# Altium PCB Motion_detector_ESP32.PcbDoc
Units mm, origin at the board's own origin, x right, y up, seen from the top; angles counter-clockwise.
Board outline 34 x 63 mm, 2 copper layers (Top Layer, Bottom Layer); 4 components, 15 nets, 35 pads, 0 vias.
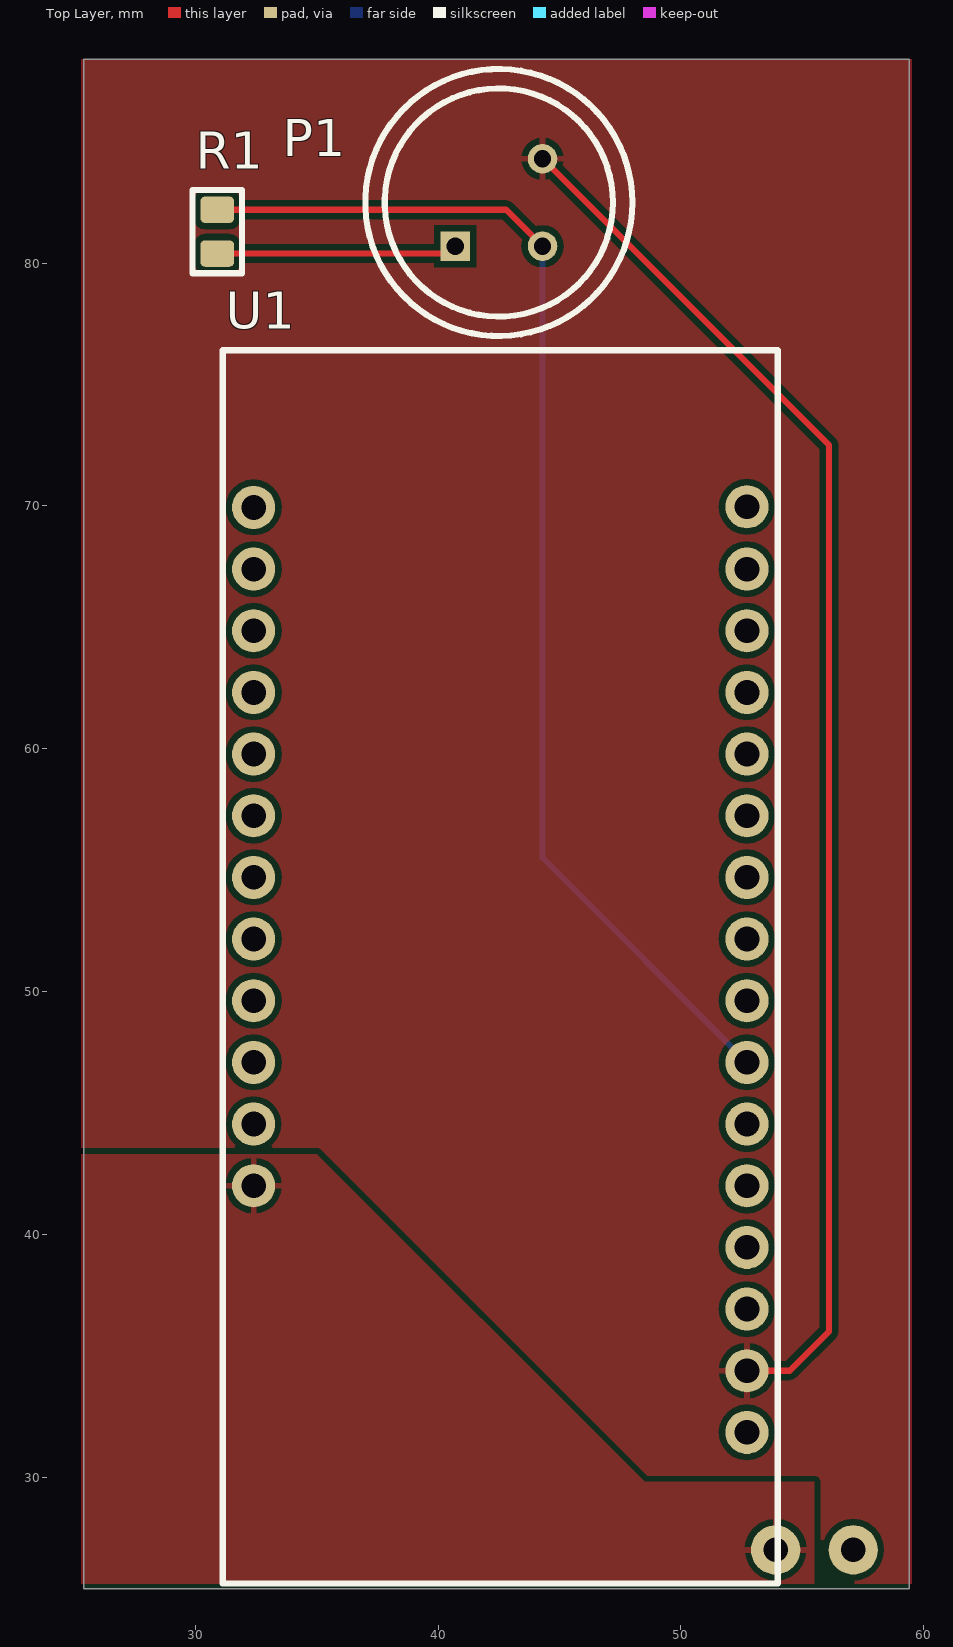
[diagram p0: Top Layer view]
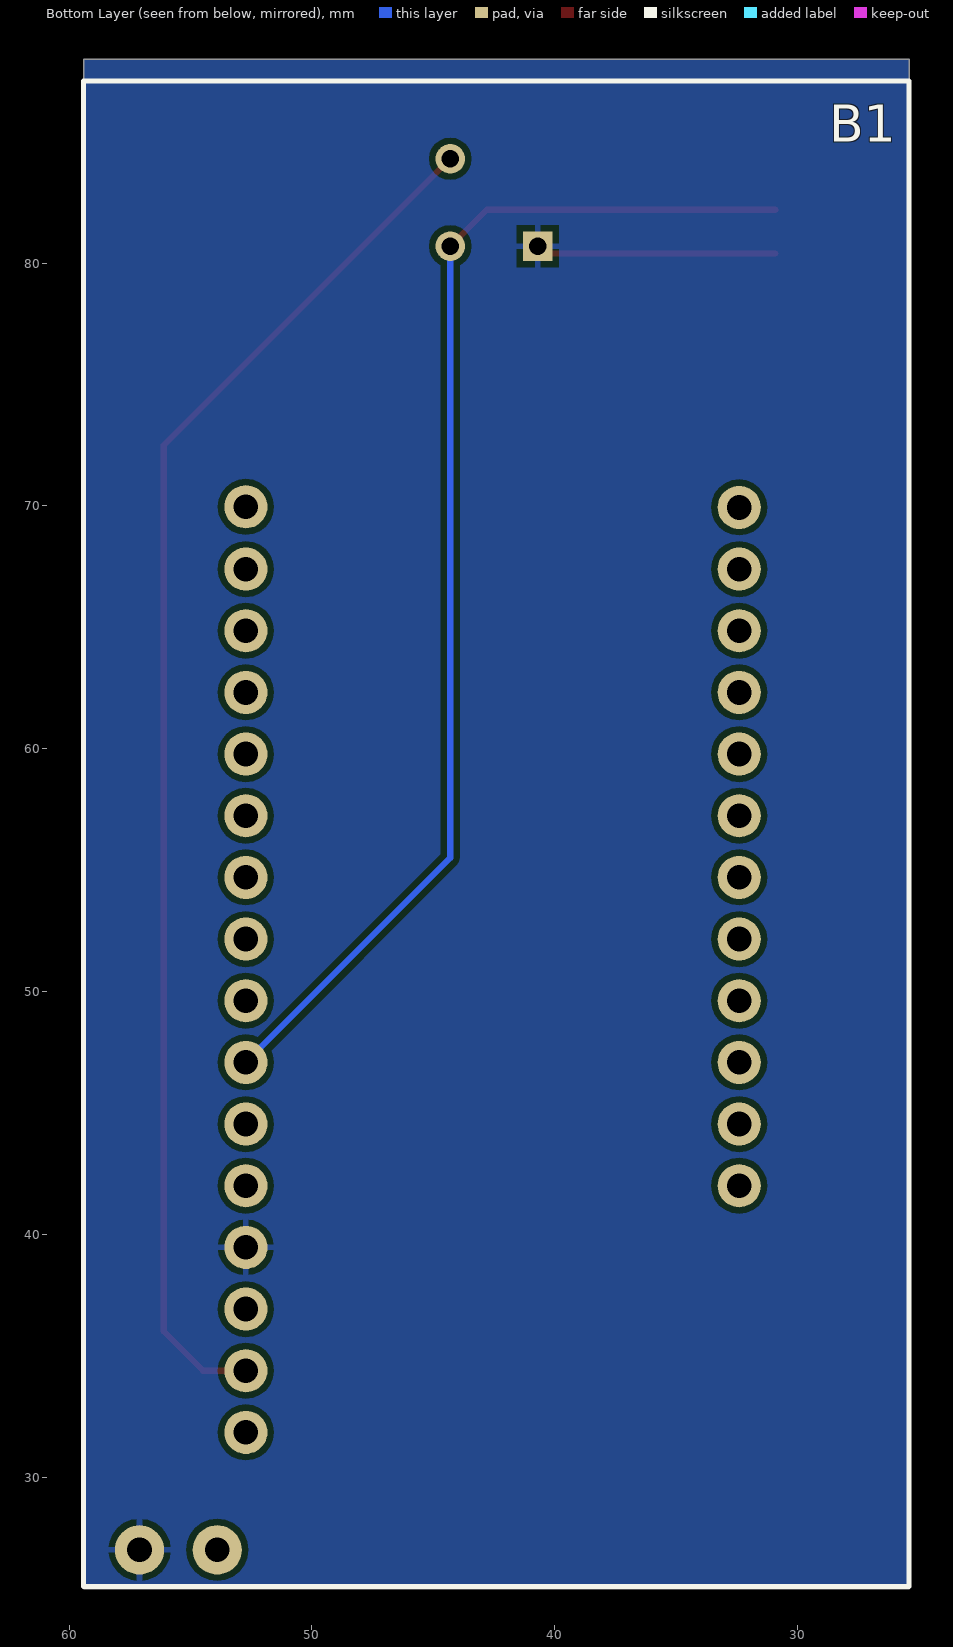
[diagram p1: Bottom Layer view, seen from below]
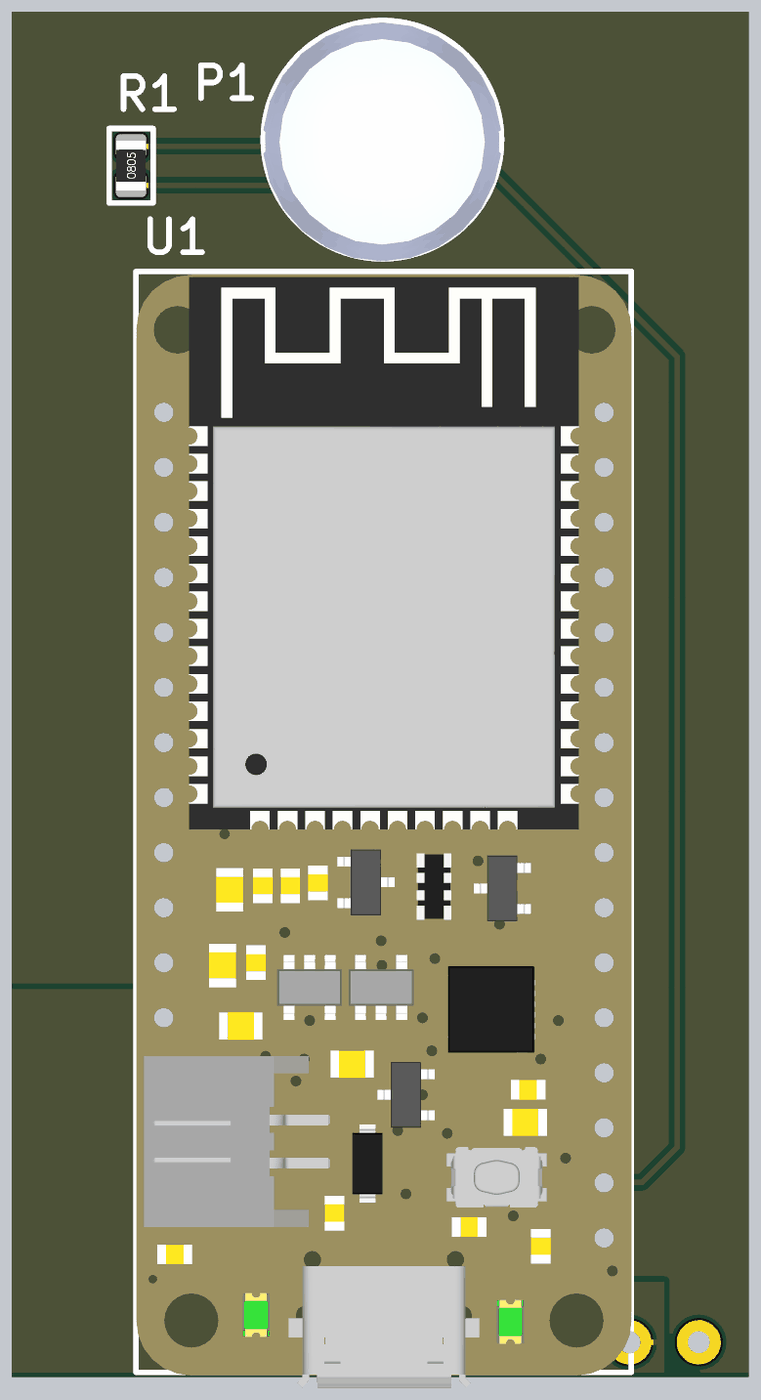
[diagram p2: 3D render of the assembled board from above, using the file's embedded part models]

## Layer stack, top to bottom
Top Solder: solder mask 0.0102, Solder Resist, Dk 3.5
Top Layer: signal copper 0.0356
Dielectric 1: dielectric 0.32, FR-4, Dk 4.8
Bottom Layer: signal copper 0.0356
Bottom Solder: solder mask 0.0102, Solder Resist, Dk 3.5

## Board outline
25.4,25.4 59.4,25.4 59.4,88.4 25.4,88.4

## Design rules (kind name [scope] priority, off if disabled: settings)
Clearance [All] p1: gap=0.254 ignorepadtopadclearanceinfootprint=FALSE except(0: Arc-Hole Track-Hole SMDPad-Hole THPad-Hole Via-Hole Fill-Hole Poly-Hole Region-Hole Text-Hole)
PolygonConnect [All] p1: connectstyle=Relief reliefconductorwidth=0.254 reliefentries=4 polygonreliefangle="90 Angle" airgapwidth=0.254
RoutingVias [All] p1: holewidth=0.711 width=1.27 viastyle="Through Hole" minholewidth=0.711 minwidth=1.27 maxholewidth=0.711 maxwidth=1.27
SolderMaskExpansion [All] p1: expansion=0.102
Width [All] p1: maxlimit=0.254 minlimit=0.254 preferedwidth=0.254
30 further rules are at their usual default settings.

## Components (designator, comment, footprint, x,y, rotation, side; value= is the part's Value field where it differs from the comment)
B1 "Battery" BATTERY-3.7V-1200MAH 59.4,25.5 r180 bottom
P1 "PIR Motion Sensor" EKMB1301111K 42.5,82.5 r0 top
R1 "RES - 0805" RES_0805 30.9,81.3 r90 top value=4.7k (schematic designator R?)
U1 "ESP32_FEATHER_ADAFRUIT" ESP32_FEATHER 32.4,31.84 r90 top

## Footprints (in the part's own frame and the unit in brackets; to place one, negate y for a bottom-side part, rotate by r counter-clockwise, add the part's x,y. Pads: shape width x height; smd on the part's side, far side on the other; paste and mask are expansions set on the pad)
BATTERY-3.7V-1200MAH [mil] "adafruit batery"
  round 80 hole 40: 1(90.55,59.06) 2(216.54,59.06)
  silkscreen extent 0,0 1339,2441, body extent 0,0 1339,2441, height 197
EKMB1301111K [mm] "PIR motion detector"
  rect 1.218x1.218 hole 0.71: 1(-1.8,-1.8)
  round 1.218 hole 0.71: 2(1.8,-1.8) 3(1.8,1.8)
  silkscreen extent -5.5,-5.5 5.5,5.5, body extent -5.5,-5.62 5.48,5.42, height 14.45
ESP32_FEATHER [mil] "ESP32 board"
  round 70 hole 40: 1(1500.98,-800) 2(1400,-800) 3(1300,-800) 4(1200,-800) 5(1100,-800) 6(1000,-800) 7(900,-800) 8(800,-800) 9(700,-800) 10(600,-800) 11(500,-800) 12(400,-800) 13(300,-800) 14(200,-800) 15(100,-800) 16(0,-800) 17(400,0) 18(500,0) 19(600,0) 20(700,0) 21(800,0) 22(900,0) 23(1000,0) 24(1100,0) 25(1200,0) 26(1300,0) 27(1400,0) 28(1500,0)
  silkscreen extent -245,-850 1755,50, body extent -273,-850 1749,50, height 251
RES_0805 [mil]
  rrect37% 43x55 smd: 1(-35.5,0) 2(35.5,0)
  silkscreen extent -68,-40 68,40, body extent -45,-27 45,27, height 30

## Part data
P1: "Sensor PIR (Passive Infrared) 197\" (5m) 16.4' Polyethylene, White Lens"
R1: Package=0805, CreatedBy="Jonathan Bouchard", Precision=1%

## Nets (pads, with @x,y where several pads share a name; then routed paths per layer and width w, separated by ;. In a path a pad name is that pad's centre, name@x,y a point inside that pad or via, vN(x,y) a via of type N, cw(c..) or ccw(c..) an arc to the next point about the centre after c; other vN are vias at no path point)
3V3: P1.3 U1.15 | length 57.2
  Top Layer w0.254: P1.3 56.1,72.5 56.1,36 54.48,34.38 U1.15
GND: B1.1 P1.1 R1.1 U1.13 | length 9.9
  Top Layer w0.254: R1.1 40.398,80.398 P1.1
GPI33: U1.23
GPI34: P1.2 R1.2 U1.10 | length 51.1
  Top Layer w0.254: R1.2 42.798,82.202 P1.2
  Bottom Layer w0.254: P1.2 44.3,55.5 U1.10
GPI36: U1.8
GPI39: U1.9
GPIO4: U1.7
GPIO14: U1.26
GPIO15: U1.24
GPIO21: U1.1
GPIO26: U1.12
GPIO27: U1.22
IO32: U1.25
VBAT: B1.2 U1.17
VBUS: U1.19
pads on no net: U1.2 U1.3 U1.4 U1.5 U1.6 U1.11 U1.14 U1.16 U1.18 U1.20 U1.21 U1.27 U1.28

## Polygon pours and split planes (outlines as drawn)
GND on Bottom Layer "Bottom Layer-GND" (solid, pour order 0): 25.4,25.5 59.4,25.5 59.4,88.4 25.4,88.4
3V3 on Top Layer "Top Layer-3V3" (solid, pour order 4): 25.3,43.3 25.3,88.4 59.5,88.4 59.5,25.6 55.5,25.6 55.5,29.8 48.5,29.8 35,43.3
VBAT on Top Layer "Top Layer-VBAT" (solid, pour order 2): 55.5,25.6 55.5,29.8 48.5,29.8 35,43.3 25.3,43.3 25.3,25.6